# EAGLE board ict_180°-xs-V2 (EAGLE 9.6.2)
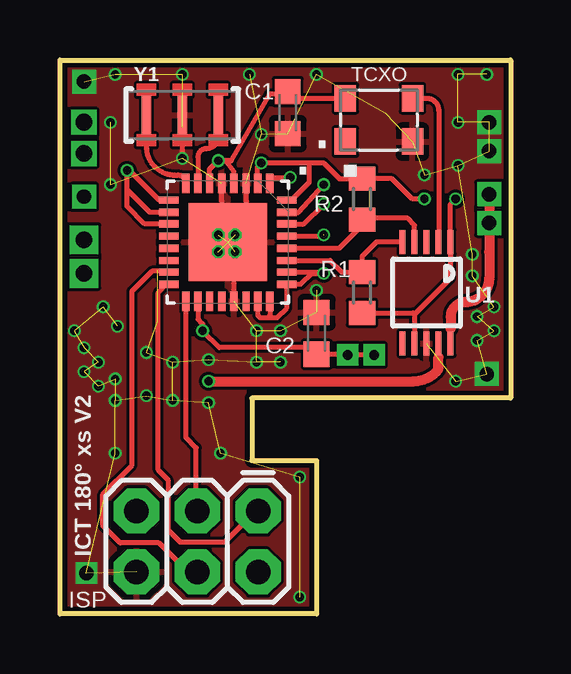
[diagram p0: board, top side]
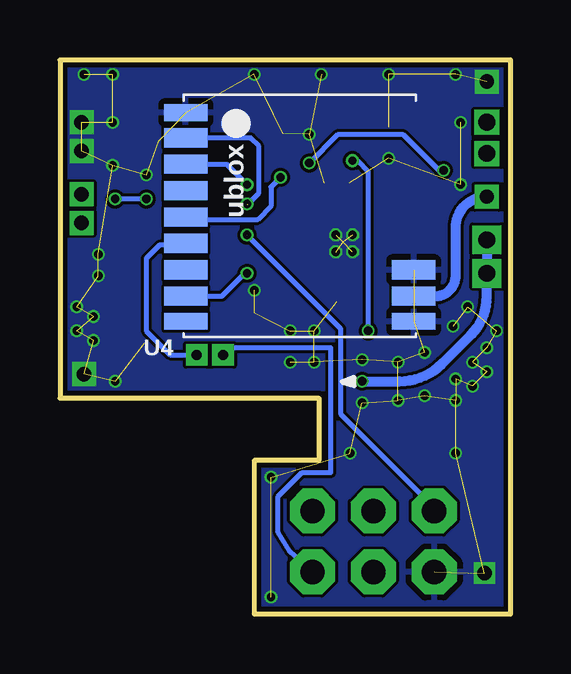
[diagram p1: board, bottom side, seen from below]

Size 18.8 x 23.1 mm. Coordinates in mm from the lower left corner, seen from the top.
Outline: 0,23.1 18.8,23.1 18.8,9 8,9 8,6.4 10.7,6.4 10.7,0 0,0 0,23.1
Copper layers (1*16): Top 0.035559375mm / dielectric 1.6mm / Bottom 0.035559375mm
Design rules "jlcpcb2layer *": minimum track width 5mil, minimum drill 12mil, track to track 5mil, track to pad 5mil, pad to pad 5mil, via to via 5mil, smd to smd 5mil, copper to edge 8mil, drill to drill 6mil, minimum pad ring 5mil, minimum via ring 3mil, stop-mask expansion 2.5mil, vias tented up to drill 14mil, thermal gap 10mil
Net classes: 0 default: width 0.203 mm; 1 vcc: width 0.152 mm, clearance 0.152 mm

## Footprints (pad centres in the part's own frame; a part is rotated, then mirrored left to right if it is on the bottom)
C0603K = smd 1.05 x 1.08: 1 -0.875,0; 2 0.875,0
UBLOX_MAX = smd 1.8 x 0.7: 1_GND 4.95,-4.4; 9_V_RESET 4.95,4.3; 10_GND -4.55,4.3 | smd 1.8 x 0.8: 2_TXD1 4.95,-3.35; 3_RXD1 4.95,-2.25; 4_TIMEPULSE 4.95,-1.15; 5_EXTINT0 4.95,-0.05; 6_V_BCKP 4.95,1.05; 7_VCC_IO 4.95,2.15; 8_VCC 4.95,3.25; 11_RF_IN -4.55,3.25; 12_GND -4.55,2.15
2X3 = drill 1.016 pad 1.88 octagon: 1 0,0; 2 0,2.54; 3 2.54,0; 4 2.54,2.54; 5 5.08,0; 6 5.08,2.54
R0603 = smd 1 x 1.1: 1 -0.85,0; 2 0.85,0
3.2X2.5_KXO-84-TCXO = smd 0.9 x 1.1: 1 -1.4,-0.9; 2 1.4,-0.9; 3 1.4,0.9; 4 -1.4,0.9
MSOP10 = smd 0.25 x 1: 1 -1,-2.113; 2 -0.5,-2.113; 3 0,-2.113; 4 0.5,-2.113; 5 1,-2.113; 6 1,2.113; 7 0.5,2.113; 8 0,2.113; 9 -0.5,2.113; 10 -1,2.113
QFN50P500X500X100-33N = smd 0.813 x 0.305: 1 -2.464,1.753; 2 -2.464,1.245; 3 -2.464,0.762; 4 -2.464,0.254; 5 -2.464,-0.254; 6 -2.464,-0.762; 7 -2.464,-1.245; 8 -2.464,-1.753; 17 2.464,-1.753; 18 2.464,-1.245; 19 2.464,-0.762; 20 2.464,-0.254; 21 2.464,0.254; 22 2.464,0.762; 23 2.464,1.245; 24 2.464,1.753 | smd 0.305 x 0.813: 9 -1.753,-2.464; 10 -1.245,-2.464; 11 -0.762,-2.464; 12 -0.254,-2.464; 13 0.254,-2.464; 14 0.762,-2.464; 15 1.245,-2.464; 16 1.753,-2.464; 25 1.753,2.464; 26 1.245,2.464; 27 0.762,2.464; 28 0.254,2.464; 29 -0.254,2.464; 30 -0.762,2.464; 31 -1.245,2.464; 32 -1.753,2.464 | smd 3.251 x 3.251: 33 0,0
RESONATOR-SMD-4.5X2.0 = smd 0.4 x 1.6: 1 -1.5,0; 2 0,0; 3 1.5,0

## Placement (x,y rotation side)
C1  [C0603K]  9.5,20.9 270 top
C2  [C0603K]  10.7,11.7 90 top
GPS  UBLOX_MAX  [UBLOX_MAX]  8.6,16.5 180 bottom
ISP  [2X3]  8.27,4.29 180 top
R1  [R0603]  12.6,13.4 270 top
R2  [R0603]  12.6,17.3 90 top
TCXO  [3.2X2.5_KXO-84-TCXO]  13.3,20.6 0 top
U1  Si5351  [MSOP10]  15.29,13.4 180 top
U2  ATMEGA328P-MU  [QFN50P500X500X100-33N]  7,15.5 270 top
Y1  [RESONATOR-SMD-4.5X2.0]  5.1,20.8 0 top

## Library data of the parts
C1 C2 = rcl; SPICEPREFIX: C
GPS = Max gps
ISP = SparkFun
R1 R2 = resistor
TCXO = crystal-geyer_V1_0
U1 = microbuilder
U2 = ava; MPN: ATMEGA328P-MU; OC_FARNELL: 1748522; OC_NEWARK: 26R2526; PACKAGE: QFN-32; SUPPLIER: Atmel
Y1 = SparkFun-Clocks

## Nets
7_VCC_IO: GPS.7_VCC_IO
9_V_RESET: GPS.9_V_RESET
ANT: U1.10
ANT180: U1.9
ENABLE: R1.2 R2.2 U1.1 U1.7 U2.2 U2.9 U2.10 U2.11 U2.32
GND: C1.2 C2.2 GPS.1_GND GPS.10_GND GPS.12_GND ISP.6 TCXO.2 U1.8 U2.3 U2.5 U2.21 U2.33 Y1.2
GND/NC: TCXO.1
GPS: GPS.11_RF_IN
GPS-OFF: GPS.5_EXTINT0 U2.1
GPS_POWER: GPS.8_VCC U2.23 U2.24 U2.25 U2.26
MISO: ISP.1 U2.16
MOSI: ISP.4 U2.15
N$1: U2.7 Y1.3
N$3: U2.8 Y1.1
N$19: TCXO.3 U1.2
RESET: ISP.5 U2.29
SCK: ISP.3 U2.17
SCL: R2.1 U1.4 U2.28
SDA: R1.1 U1.5 U2.27
SERIAL_IN: GPS.2_TXD1 U2.30
SERIAL_OUT: GPS.3_RXD1 U2.31
VIN: C1.1 C2.1 GPS.6_V_BCKP ISP.2 TCXO.4 U2.4 U2.6 U2.18

## Tracks (layer width: path | path; a pad name or v marks a point on that pad's centre or on a via)
ANT  (via drill 0.6 pad 1)
  Top 0.203: 16.3,11.9 16.29,11.89 U1.10
  Top 0.406: 16.3,11.9 16.3,12.4 arc-90 16.9,13 arc90 17.9,14 17.9,15.1 v17.9,16.3 v17.9,17.5
ANT180  (via drill 0.35, 0.7 pad 1.2)
  Top 0.203: 15.79,10.71 U1.9
  Top 0.406: v6.2,9.7 14.73,9.7 arc45 15.7,10.1 arc45 15.79,10.32 15.79,10.71
  Bottom 0.406: v1,15.6 v1,14.2 1,13.21 arc45 1.64,11.66 2.86,10.44 arc45 4.65,9.7 v6.2,9.7
ENABLE  (via drill 0.35)
  Top 0.203: 14.79,12.49 U1.7 14.8,11.03 | 14.79,12.49 16.29,13.99 U1.1 16.29,17.09 v16.5,17.3 | R1.2 14.73,12.55 14.79,12.49 | 10.4,18.8 11,18.8 11.65,18.15 R2.2 13.85,18.15 14.7,17.3 v15.2,17.3 | 10.4,18.8 v8.4,18.8 8.25,18.64 U2.2 | U2.32 9.65,17.25 10.4,18 10.4,18.8 | v2.8,18.5 2.84,18.54 4.14,17.25 U2.9 | U2.10 3.76,16.75 2.8,17.7 v2.8,18.5 | v2.8,18.5 2.8,17 3.54,16.26 U2.11
  Bottom 0.203: v15.2,17.3 v16.5,17.3 | v8.4,18.8 7.2,20 4.5,20 3,18.5 v2.8,18.5
GND  (via drill 0.35, 0.6 pad 0.7, 0.6 pad 1)  (62 unrouted)
  Top 0.203: 7.8,17.93 U2.3 7.76,16.26 U2.33 | 5.1,20.3 v5.1,19 | U2.21 7.25,15.25 U2.33 | U2.5 6.75,15.75 U2.33
  other vias: 10.7,13.5 1,10.1 8.2,11.8 9.2,11.8 7.3,15.8 6.6,15.8 6.6,15.1 7.3,15.1 16.6,22.5 17.8,22.5 10.7,22.5 16.6,20.5 18.1,12.8 7.9,22.5 1.1,1.7 15.2,18.3 8.4,20 17.2,14.1 17.4,12.4 17.9,20.5 17.9,19.3 17.2,15 17.8,10 1.6,10.5 2.3,9.8 2.3,8.9 6.7,6.7 1.6,9.5 10,5.7 10,0.7 2.3,6.7 3.6,10.9 4.7,10.5 2.1,20.5 2.4,12 1.8,12.8 17.4,11.4 18.1,11.8 8.2,10.5 9.2,10.5 1,11.1 6.2,10.6 2.3,22.5 5.1,22.5 3.6,9.1 4.7,8.9 6.2,8.8 2.1,17.9 16.6,18.7 0.6,11.8 16.5,9.7 1,22.2
  pour Top: -5.29,25.42 37.55,25.42 37.55,-3.69 -5.39,-3.69 -5.39,25.32
  pour Bottom: -5.39,25.42 37.55,25.42 37.55,-3.69 -5.39,-3.69
GPS  (via drill 0.6 pad 1)
  Bottom 0.406: GPS.11_RF_IN 3.15,13.25 arc-90 2.3,14.1 2.3,16.1 arc90 v1,17.4
GPS-OFF  (via drill 0.35)
  Top 0.203: U2.1 8.75,18.06 8.89,18.2 v9.6,18.2
  Bottom 0.203: v9.6,18.2 10,17.8 10,17 10.55,16.45 13.45,16.45 GPS.5_EXTINT0
GPS_POWER  (via drill 0.35)
  Top 0.203: 8.79,13 U2.24 8.75,12.45 8.65,12.35 | 9.56,14.25 U2.26 10.95,14.25 v11,14.2 10.5,14.2 10.05,13.75 U2.25 9.46,12.76 9.05,12.35 8.65,12.35 | U2.23 8.25,12.45 8.35,12.35 8.65,12.35
  Bottom 0.203: GPS.8_VCC 12.05,13.25 11.1,14.2 v11,14.2
MISO
  Top 0.203: ISP.1 8.16,4.29 6.88,3 5,3 4.5,3.5 4.5,5.6 4.1,6 4.1,13.41 4.44,13.75 U2.16
MOSI
  Top 0.203: U2.15 4.47,14.26 | 4.63,14.29 U2.15 | U2.15 4.5,14.29 3.83,14.29 3,13.46 3,6.2 1.79,4.98 1.79,3.69 2.51,2.96 4.13,2.96 5.34,1.75 ISP.4
N$1
  Top 0.203: Y1.3 6.6,19.9 arc-90 6.1,19.4 arc90 5.76,19.05 U2.7
N$3
  Top 0.203: Y1.1 3.6,19.5 arc90 4.8,18.3 4.91,18.3 arc-90 U2.8
N$7  (via drill 0.7 pad 1)
  other vias: 1,20.5
N$8  (via drill 0.7 pad 1)
  other vias: 1,19.2
N$19
  Top 0.203: TCXO.3 15.3,21.5 arc-90 15.8,21 15.8,15.52 arc-90 U1.2
RESET  (via drill 0.35)  (1 unrouted)
  Top 0.203: v11,15.8 10.95,15.75 U2.29
  Bottom 0.203: v11,15.8 7.1,11.9 7.1,8.34 3.21,4.45 ISP.5
SCK
  Top 0.203: 5.29,13.04 U2.17 5.25,7.36 5.68,6.93 5.68,4.45 ISP.3
SCL
  Top 0.203: U2.28 11.65,15.25 12.6,16.2 R2.1 12.65,16.5 14.5,16.5 14.79,16.21 U1.4
SDA
  Top 0.203: U1.5 13.2,15.51 12.6,14.91 R1.1 11.75,14.25 11.26,14.74 U2.27
SERIAL_IN  (via drill 0.35)  (1 unrouted)
  Top 0.203: U2.30 10.16,16.26 v11,17.1
  Bottom 0.203: GPS.2_TXD1 10.85,19.85 10.5,19.5 10.5,17.55 10.98,17.07
SERIAL_OUT  (via drill 0.35)
  Top 0.203: U2.31 9.95,16.75 v11,17.9
  Bottom 0.203: v11,17.9 11.85,18.75 GPS.3_RXD1
VIN  (via drill 0.35, 0.4 pad 0.9)
  Top 0.203: U2.18 5.76,12.29 5.95,12.1 v5.95,11.8 6.65,11.1 10.43,11.1 C2.1 11.98,10.82 v12,10.8 v13.1,10.8 | U2.6 6.24,18.54 v6.6,18.9 | U2.4 7.25,18.45 6.9,18.9 v6.6,18.9 | v6.6,18.9 7.14,18.9 8.73,21.68 9.4,21.68 C1.1 9.48,21.5 TCXO.4
  Bottom 0.203: v6.6,18.9 6.4,18.9 5.95,18.45 v5.95,11.8 | GPS.6_V_BCKP 13.62,15.38 14.64,15.38 15.2,14.82 15.2,11.8 14.2,10.8 v13.1,10.8 | ISP.2 9.2,2.6 9.7,3.4 9.7,4.9 8.7,5.9 7.5,5.9 7.5,11.1 11.7,11.1 v12,10.8

## Text on the board
tNames: . | . | ICT 180° xs V2
bNames: U4